# EAGLE board routev8.5 (EAGLE 8.6.0)
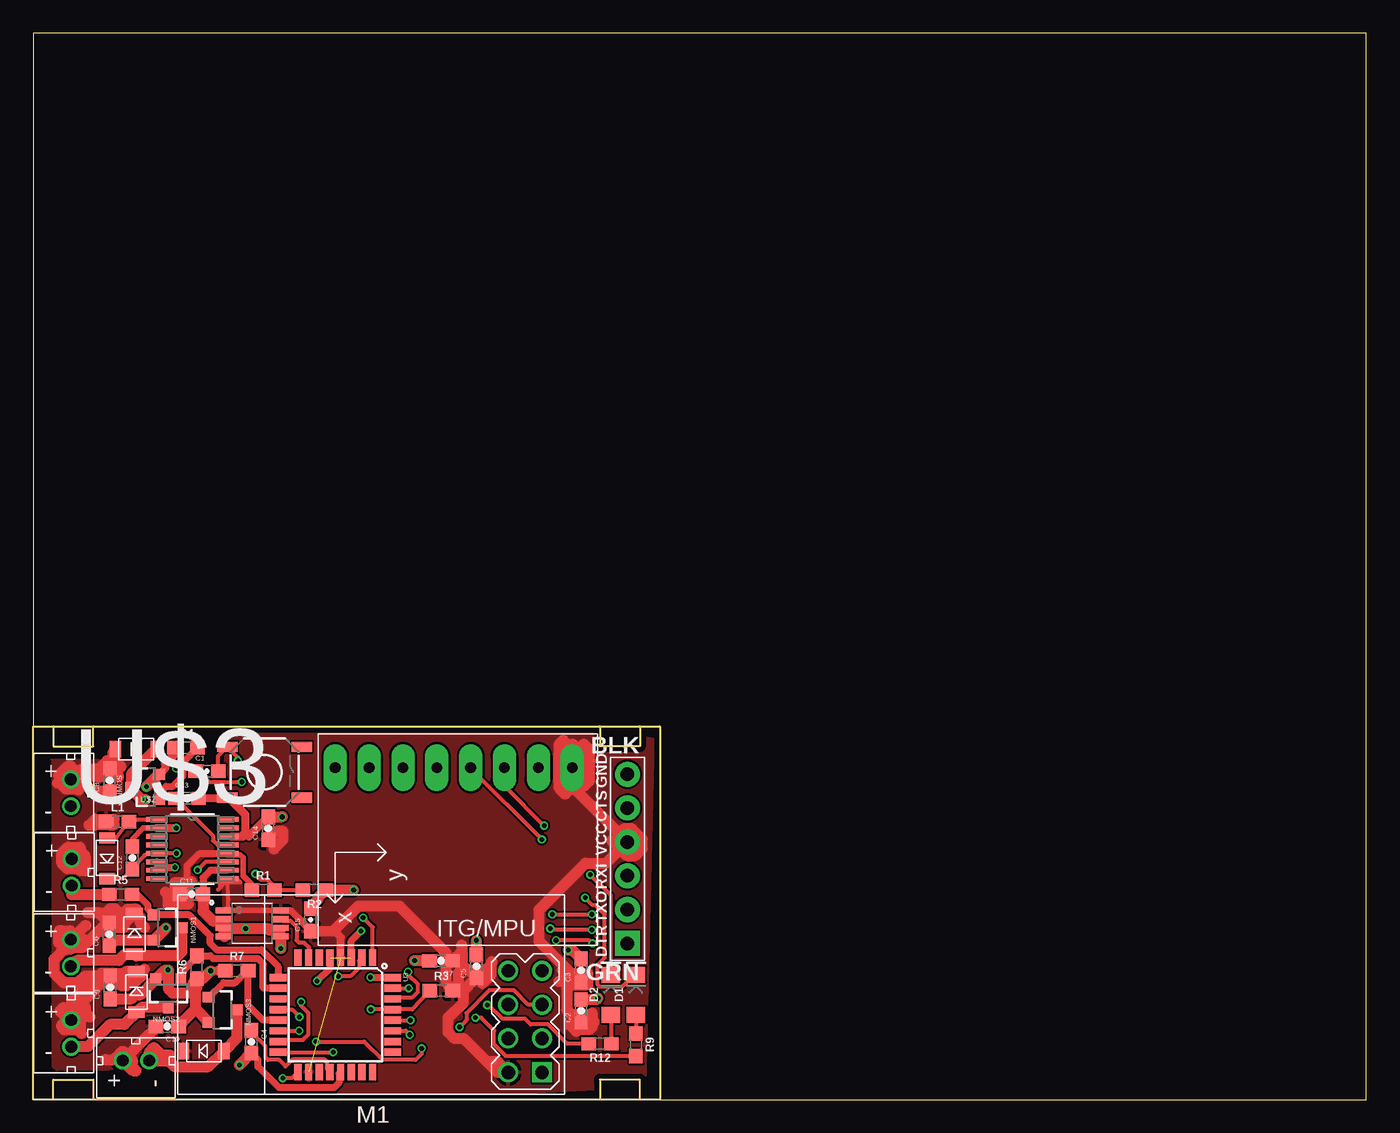
[diagram p0: board, top side]
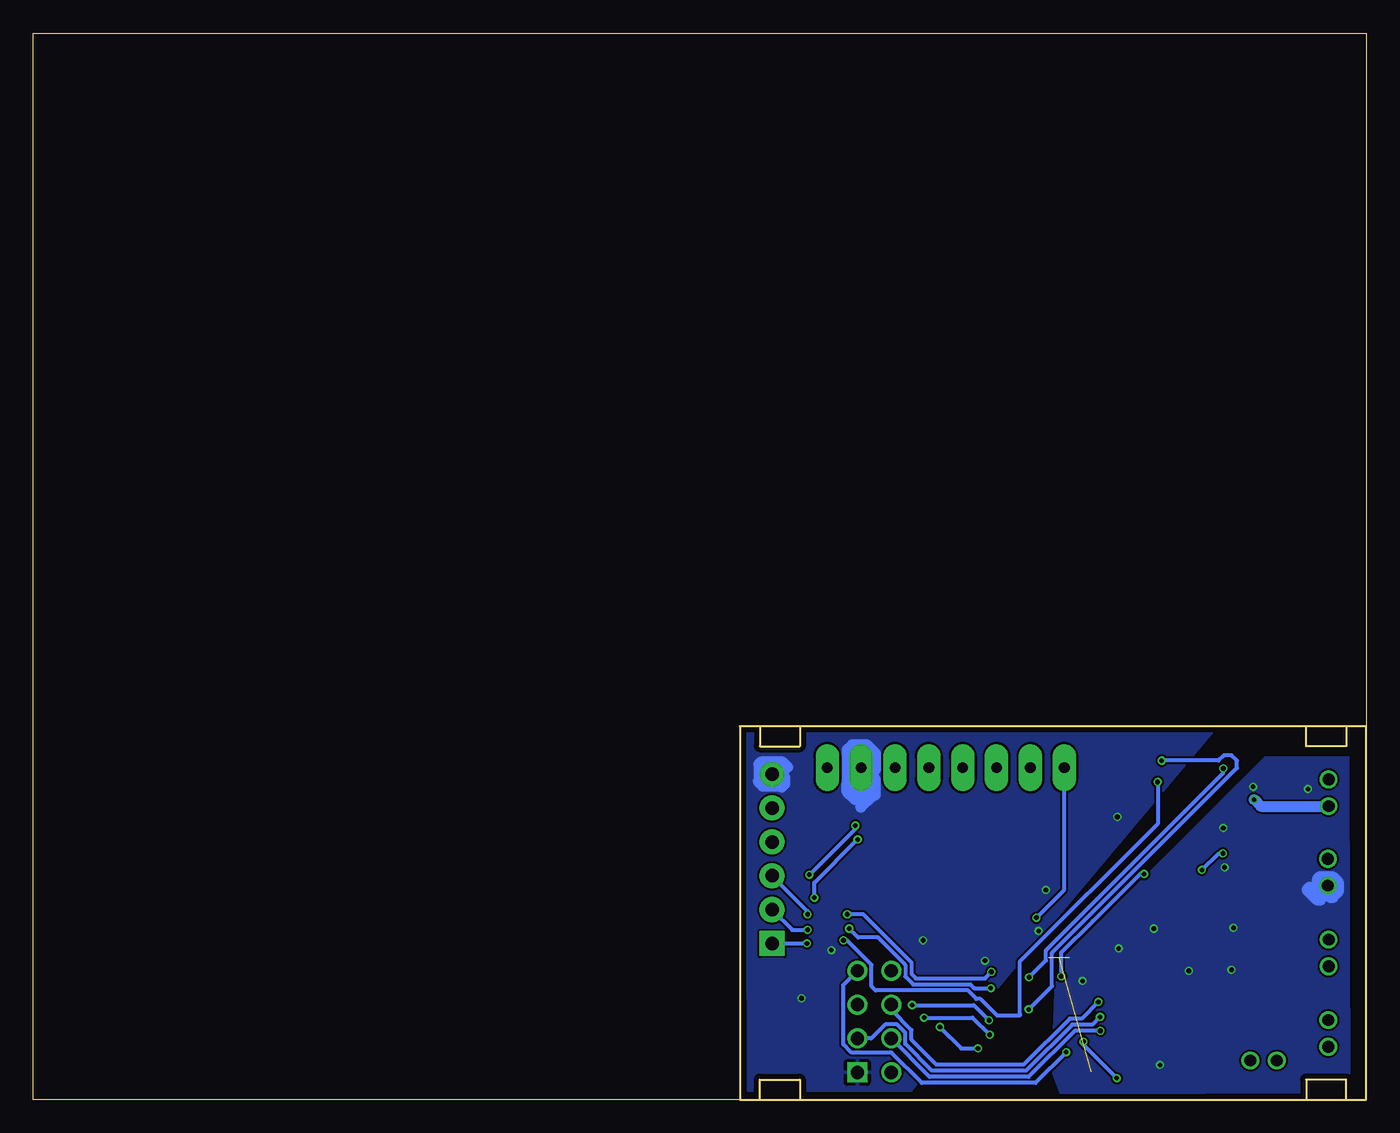
[diagram p1: board, bottom side, seen from below]

Size 100 x 80 mm. Coordinates in mm from the lower left corner, seen from the top.
Outline: 47,0 100,0 100,80 0,80 0,28
Outline: 0,28 1.5,28
Outline: 1.5,28 4.5,28
Outline: 4.5,28 42.5,28
Outline: 42.5,28 45.5,28
Outline: 45.5,28 47,28 47,0
Outline: 47,0 45.5,0
Outline: 45.5,0 42.5,0
Outline: 42.5,0 4.5,0
Outline: 4.5,0 1.5,0
Outline: 1.5,0 0,0 0,28
Outline: 42.5,28 42.5,26.5 45.5,26.5 45.5,28
Outline: 45.5,0 45.5,1.5 42.5,1.5 42.5,0
Outline: 1.5,0 1.5,1.5 4.5,1.5 4.5,0
Outline: 1.5,28 1.5,26.5 4.5,26.5 4.5,28
Copper layers (1*16): Top 0.035559375mm / dielectric 1.6mm / Bottom 0.035559375mm
Design rules "oshpark-2layer": minimum track width 6mil, minimum drill 10mil, track to track 6mil, track to pad 6mil, pad to pad 6mil, via to via 6mil, smd to smd 6mil, copper to edge 15mil, drill to drill 6mil, minimum pad ring 5mil, minimum via ring 5mil, stop-mask expansion 2.5mil, vias tented up to drill 0mil, thermal gap 10mil

## Footprints (pad centres in the part's own frame; a part is rotated, then mirrored left to right if it is on the bottom)
0603-CAP = smd 1.1 x 1: 1 -0.85,0; 2 0.85,0
LED-1206 = smd 1.2 x 1.4: A -1.5,0; C 1.5,0
MINI2-F3-B = smd 1.22 x 0.85: NEG 0,1.55; POS 0,-1.5
FTDI_DEVICE_SIDE = drill 1.016 pad 1.88 square: P$1 -6.35,0 | drill 1.016 pad 1.88: P$2 -3.81,0; P$3 -1.27,0; P$4 1.27,0; P$5 3.81,0; P$6 6.35,0
0603 = smd 1.1 x 1: 1 -0.85,0; 2 0.85,0
WIRELESS-NRF24L01 = drill 1 square: 1 -12.7,6.35 | drill 1: 2 -10.16,6.35; 3 -12.7,3.81; 4 -10.16,3.81; 5 -12.7,1.27; 6 -10.16,1.27; 7 -12.7,-1.27; 8 -10.16,-1.27
JST_CONNECTOR_FEMALE = drill 0.889: + 0,1; - 0,-1
SOT23-3 = smd 0.8 x 0.9: 1 -0.95,-1; 2 0.95,-1; 3 0,1.1
TACTILE-SWITCH-SMD = smd 1.524 x 0.762: 1 -2.794,1.905; 2 2.794,1.905; 3 -2.794,-1.905; 4 2.794,-1.905
GY-521 = drill 0.8 pad 1.778 long: ADO -8.89,-6.35; GND -8.89,6.35; INT -8.89,-8.89; SCL -8.89,3.81; SDA -8.89,1.27; VCC -8.89,8.89; XCL -8.89,-3.81; XDA -8.89,-1.27
TQFP32-08 = smd 1.27 x 0.559: 1 -4.293,2.8; 2 -4.293,2; 3 -4.293,1.2; 4 -4.293,0.4; 5 -4.293,-0.4; 6 -4.293,-1.2; 7 -4.293,-2; 8 -4.293,-2.8; 17 4.293,-2.8; 18 4.293,-2; 19 4.293,-1.2; 20 4.293,-0.4; 21 4.293,0.4; 22 4.293,1.2; 23 4.293,2; 24 4.293,2.8 | smd 0.559 x 1.27: 9 -2.8,-4.293; 10 -2,-4.293; 11 -1.2,-4.293; 12 -0.4,-4.293; 13 0.4,-4.293; 14 1.2,-4.293; 15 2,-4.293; 16 2.8,-4.293; 25 2.8,4.293; 26 2,4.293; 27 1.2,4.293; 28 0.4,4.293; 29 -0.4,4.293; 30 -1.2,4.293; 31 -2,4.293; 32 -2.8,4.293
21-0055H_16 = smd 1.6 x 0.356: 1 -2.654,2.223; 2 -2.654,1.587; 3 -2.654,0.953; 4 -2.654,0.318; 5 -2.654,-0.318; 6 -2.654,-0.953; 7 -2.654,-1.587; 8 -2.654,-2.223; 9 2.654,-2.223; 10 2.654,-1.587; 11 2.654,-0.953; 12 2.654,-0.318; 13 2.654,0.318; 14 2.654,0.953; 15 2.654,1.587; 16 2.654,2.223
SOP65P490X110-8N = smd 1.25 x 0.46: 1 -2.11,0.975; 2 -2.11,0.325; 3 -2.11,-0.325; 4 -2.11,-0.975; 5 2.11,-0.975; 6 2.11,-0.325; 7 2.11,0.325; 8 2.11,0.975

## Placement (x,y rotation side)
C1  100nF  [0603-CAP]  13.03,24.63 0 top
C2  10uF  [0603-CAP]  41.1,6.65 90 top
C3  100nF  [0603-CAP]  41.1,9.7 90 top
C4  100nF  [0603-CAP]  16.36,4.34 270 top
C5  100nF  [0603-CAP]  33.25,10.01 90 top
C6  100uF  [0603-CAP]  5.69,12.4 90 top
C7  100nF  [0603-CAP]  30.59,10.41 180 top
C8  100uF  [0603-CAP]  5.74,23.95 90 top
C9  100uF  [0603-CAP]  5.77,8.41 90 top
C10  100uF  [0603-CAP]  10.06,5.49 180 top
C11  100uF  [0603-CAP]  11.89,15.41 0 top
C12  100uF  [0603-CAP]  7.44,18.13 90 top
C13  0.1uF  [0603-CAP]  11.53,22.6 0 top
C14  4.7uF  [0603-CAP]  17.63,20.36 90 top
C15  100nF  [0603-CAP]  20.8,13.49 90 top
D1  Yellow  [LED-1206]  45.21,7.87 90 top
D2  Yellow  [LED-1206]  43.33,7.87 90 top
DIODE  DB2W40300L  [MINI2-F3-B]  7.72,26.29 90 top
DIODE1  DB2W40300L  [MINI2-F3-B]  7.59,12.42 0 top
DIODE2  DB2W40300L  [MINI2-F3-B]  7.75,8.05 0 top
DIODE3  DB2W40300L  [MINI2-F3-B]  12.8,3.63 90 top
DIODE4  DB2W40300L  [MINI2-F3-B]  5.54,18.13 180 top
J2  FTDI_DEVICE  [FTDI_DEVICE_SIDE]  44.58,18.06 90 top
L1  10uH  [0603]  6.32,20.84 0 top
M1  WIRELESS-NRF24L01  [WIRELESS-NRF24L01]  25.47,8.39 180 top
MOTOR  JST_CONNECTOR_FEMALE  [JST_CONNECTOR_FEMALE]  2.82,23.01 0 top
MOTOR1  JST_CONNECTOR_FEMALE  [JST_CONNECTOR_FEMALE]  2.82,11 0 top
MOTOR2  JST_CONNECTOR_FEMALE  [JST_CONNECTOR_FEMALE]  2.84,4.97 0 top
MOTOR3  JST_CONNECTOR_FEMALE  [JST_CONNECTOR_FEMALE]  7.7,2.92 90 top
NMOS  N-CHANNEL-MOSFET-IRLML6244TRPBF  [SOT23-3]  8.46,23.44 90 top
NMOS1  N-CHANNEL-MOSFET-IRLML6244TRPBF  [SOT23-3]  10.03,12.9 270 top
NMOS2  N-CHANNEL-MOSFET-IRLML6244TRPBF  [SOT23-3]  10.13,8 180 top
NMOS3  N-CHANNEL-MOSFET-IRLML6244TRPBF  [SOT23-3]  14.17,6.73 270 top
R1  2.2k  [0603]  17.25,15.72 0 top
R2  2.2k  [0603]  21.08,15.72 180 top
R3  10k  [0603]  30.61,8.18 0 top
R4  10k  [0603]  11.46,26.39 0 top
R5  10k  [0603]  6.55,15.39 0 top
R6  10k  [0603]  12.27,9.93 90 top
R7  10k  [0603]  15.27,9.68 0 top
R9  1k  [0603]  45.21,4.11 270 top
R12  1k  [0603]  42.52,4.19 180 top
S1  SWITCH-MOMENTARY-2SMD  [TACTILE-SWITCH-SMD]  17.35,24.56 0 top
U2  GY-521MPU6050  [GY-521]  31.54,16.01 270 top
U3  ATMEGA328P_TQFP  [TQFP32-08]  22.66,6.36 270 top
U$1  JST_CONNECTOR_FEMALE  [JST_CONNECTOR_FEMALE]  2.87,17.05 0 top
U$2  MAX1672'MAX1672'  [21-0055H_16]  11.93,18.79 0 top
U$3  LTC6930CMS8-8.19LTC6930CMS8-8.19  [SOP65P490X110-8N]  16.43,13.21 0 top

## Library data of the parts
C1 C15 = SparkFun-Capacitors; PROD_ID: CAP-00810
C2-C14 = SparkFun-Passives
D1 D2 = SparkFun-LED; PROD_ID: DIO-09909
DIODE DIODE1-DIODE4 J2 M1 MOTOR MOTOR1-MOTOR3 U2 U$1 = quad
L1 = SparkFun-Coils; PROD_ID: NDUC-07874
NMOS NMOS1-NMOS3 = quad; DATASHEET: http://www.mouser.com/ds/2/196/irlml6244pbf-936666.pdf; MOUSER: 942-IRLML6244TRPBF; URL: http://www.mouser.com/Search/ProductDetail.aspx?R=IRLML6244TRPBFvirtualkey57370000virtualkey942-IRLML6244TRPBF
R1-R7 R9 R12 = SparkFun-Resistors; PROD_ID: RES-08272
S1 = quad; PROD_ID: SWCH-08247
U3 = quad; PROD_ID: IC-09069
U$2 = voltreg
U$3 = LTC6390

## Nets
BATTERY+: C6.2 C8.2 C9.2 C10.2 C11.1 DIODE1.NEG DIODE2.NEG DIODE3.NEG DIODE.NEG L1.1 MOTOR1.+ MOTOR2.+ MOTOR3.+ MOTOR.+ R1.1 U$1.+ U$2.12
FTDI-RX: J2.P$3 U3.30
FTDI-TX: J2.P$2 U3.31
GND: C2.2 C3.2 C4.2 C5.2 C6.1 C7.2 C8.1 C9.1 C10.1 C11.2 C12.2 C13.2 C14.2 C15.2 J2.P$6 M1.1 NMOS1.2 NMOS2.2 NMOS3.2 NMOS.2 R2.1 R4.1 R5.1 R6.1 R7.1 S1.3 U2.GND U3.3 U3.5 U3.21 U$1.- U$2.2 U$2.6 U$2.7 U$2.10 U$2.14 U$3.2 U$3.3 U$3.4 U$3.5 U$3.6
IMU-INT: U2.INT U3.1
IMU-SCL: D2.C U2.SCL
IMU-SDA: D1.C U2.SDA
MEASURE_PIN: R1.2 R2.2 U3.2
MOTOR1: NMOS.1 R4.2 U3.32
MOTOR2: NMOS1.1 R5.2 U3.9
MOTOR3: NMOS2.1 R6.2 U3.10
MOTOR4: NMOS3.1 R7.2 U3.13
N$1: DIODE4.POS L1.2 U$2.1
N$2: C4.1 U3.20
N$3: D1.A R9.1
N$4: DIODE1.POS MOTOR1.- NMOS1.3
N$5: DIODE2.POS MOTOR2.- NMOS2.3
N$6: DIODE.POS MOTOR.- NMOS.3
N$7: DIODE3.POS MOTOR3.- NMOS3.3
N$8: R9.2 U3.27
N$9: D2.A R12.1
N$10: R12.2 U3.28
N$12: C1.1 J2.P$1
OSC1: U3.7 U$3.7
RESET: C1.2 R3.1 S1.1 U3.29
RF-CE: M1.3 U3.12
RF-CSN: M1.4 U3.14
RF-MISO: M1.7 U3.16
RF-MOSI: M1.6 U3.15
RF-SCK: M1.5 U3.17
VCC: C2.1 C3.1 C5.1 C7.1 C14.1 C15.1 J2.P$4 M1.2 R3.2 U2.VCC U3.4 U3.18 U$2.9 U$3.1 U$3.8
VR-PS: C12.1 DIODE4.NEG U$2.5 U$2.11
VR-REF: C13.1 U$2.13

## Tracks (layer width: path | path; a pad name or v marks a point on that pad's centre or on a via)
BATTERY+
  Top 0.406: U$2.12 14.69,18.37 15.54,18.37 15.74,18.16 15.74,16.8 16.4,16.14 R1.1
  Top 0.508: U$2.12 14.54,18.42 12.41,18.42 11.53,17.55 11.53,16.28
  Top 0.813: C6.2 6.87,13.24 DIODE1.NEG 8.02,13.54 8.02,13.51 | C6.2 5.1,12.65 4.96,12.65 4.3,12 3.83,12 | C9.2 5.98,9.47 6.82,9.47 6.95,9.6 8.14,9.6 8.23,9.68 | C9.2 4.71,9.26 2.87,7.42 2.87,6.93 2.84,6.91 MOTOR2.+ 2.67,5.97 2.01,6.63 2.26,6.88 3.25,6.88 | C8.2 3.6,24.79 MOTOR.+ 2.52,24.31 1.91,24.31 2.6,25 2.82,25 3.73,24.09 3.73,24.02 3.4,23.69 3.4,23.21 3.34,23.27 2.46,23.27 2.01,23.72 1.83,23.72 | DIODE.NEG 6,26.11 6,25.55 6.56,24.99 6.37,24.8 C8.2 | MOTOR3.+ 9.21,5.43 C10.2 | MOTOR3.+ 6.62,3 | 6.62,3 6.04,3 | 5.41,3 6.04,3 | 6.04,3 6.66,3.61 6.75,3.61 7.44,2.92 7.44,2.82 | MOTOR3.+ 7.46,2.16 7.68,2.16 | 7.68,2.16 7.7,2.14 | 7.68,2.16 6.84,3 6.62,3 | 3.25,6.88 3.91,6.88 3.91,6.55 4.27,6.2 3.5,6.2 3.5,5.08 | 3.5,5.08 3.62,4.97 | 3.5,5.08 3.37,5.22 2.35,5.22 2.13,5.44 2.13,5.64 | 2.14,12.68 1.98,12.68 | 2.14,12.68 2.74,12.68 3.42,12 3.83,12 | MOTOR1.+ 3.88,13.06 3.96,13.06 | MOTOR1.+ 2.44,11.62 2.44,11.26 1.91,11.79 1.91,12.44 2.14,12.68 | MOTOR1.+ 2.82,11.36 | 2.82,11.36 2.74,11.28 | 2.82,11.36 2.86,11.4 | 2.86,11.4 3.24,11.4 | 3.24,11.4 3.83,12 | U$1.+ 2.87,17.64 2.54,17.31 2.13,17.71 2.13,18.47 2.59,18.92 3.5,18.92 3.5,18.67 3.89,18.29 3.89,17.17 3.53,17.17 3.39,17.31 2.82,17.31 | C8.2 6.33,24.21 | 6.33,24.21 6.39,24.21 | 6.33,24.21 4.82,24.21 4.77,24.26 4.52,24.26 4.52,24.4 5.54,25.42 | 4.46,20.84 L1.1 5.71,20.61 6.07,20.61 | 4.46,20.84 4.19,20.57 4.66,20.57 4.7,20.61 5.65,20.61 6.07,21.03 4.64,21.03 4.46,20.84 | C6.2 4.91,14.02 | 4.91,14.02 4.06,14.02 | 4.91,14.02 5.49,14.02 5.79,14.33 6.12,14.33 6.66,13.79 6.07,13.79 | 5.89,14.1 5.89,13.97 6.07,13.79 | 11.53,16.28 10.64,16.28 10.64,15.81 C11.1 10.07,15.41
  Top 0.813: 10.07,15.41 9.91,15.57 | 10.07,15.41 10.08,15.39 10.08,14.68 10.1,14.67 11.64,14.67 11.63,14.68 11.63,16.14 11.85,16.36 | DIODE2.NEG 6.71,8.56 | 6.71,8.56 7.03,8.56 7.3,8.83 7.65,8.83 8.23,9.41 8.23,9.68 | 8.23,9.68 8.35,9.8 | C9.2 5.17,8.67 5.03,8.67 3.25,6.88 | C9.2 5.55,9.47 5.13,9.47 5.94,8.67 6.5,8.67 6.6,8.56 6.71,8.56 | C9.2 3.86,9.26 3.34,8.74 2.3,8.74 1.56,9.48 1.56,10.52 2.44,11.4 2.86,11.4 | 3.24,11.4 3.68,11.4 6.07,13.79 | C6.2 6.02,12.92 | 6.02,12.92 6.78,12.92 | 6.02,12.92 5.7,12.92 | 5.7,12.92 5.43,12.65 | 5.7,12.92 7.06,14.28 7.75,14.28 | 8.02,13.51 8.02,13.22 | 8.02,13.22 8.33,12.92 8.02,13.22 | 8.02,13.22 8.02,13.51 | 8.02,13.51 8.02,13.61 8.02,13.51
  pour Top: 1.32,25.55 13.54,25.4 13.54,2.31 1.75,2.18 1.47,2.46 1.47,25.4
FTDI-RX  (via drill 0.35)
  Top 0.305: v28.12,9.58 28.12,9.37 28.85,8.64 28.85,8.07 28.45,7.67 27.07,7.67 U3.30 | v38.94,13.89 v41.91,13.89
  Bottom 0.305: v28.12,9.58 28.6,9.09 33.27,9.09 33.78,9.09 34.12,9.43 34.12,9.8 34.12,10.29 37.73,13.89 v38.94,13.89 | J2.P$3 41.91,14.12 v41.91,13.89
FTDI-TX  (via drill 0.35)
  Top 0.305: U3.31 v28.17,8.36 | v41.91,12.72 38.89,12.72 v38.79,12.83
  Bottom 0.305: v28.17,8.36 29.41,8.36 29.69,8.63 33.98,8.63 34.58,9.23 34.58,10.1 36.65,12.17 38.12,12.17 38.35,12.39 v38.79,12.83 | J2.P$2 43.05,12.72 v41.91,12.72
GND  (via drill 0.35)  (1 unrouted)
  Top 0.305: U$2.14 14.87,19.74 | 15.9,20.01 16.16,19.75 16.16,19.74 | 18.54,12.71 U$3.5 U$3.6 | U$3.3 U$3.2
  Top 0.406: C12.2 7.44,19.56 8.26,20.38 U$2.2
  Top 0.508: R7.1 14.39,9.65 v13.31,9.65 | U$2.7 U$2.6 9.69,17.42 v10.62,17.42 | U3.5 22.26,9.86 v21.29,8.89 | U3.3 23.86,11.92 v24.59,12.65 | C4.2 16.87,2.98 16.87,2.45 18.43,0.89 22.57,0.89 22.94,1.26 22.94,1.95 U3.21 | U$2.10 13.3,17.2 12.74,16.64 C11.2
  Top 0.61: C13.2 14.56,22.6 S1.3 14.62,22.65 15.9,21.38 15.9,20.01 15.72,19.84 15.72,19.74 14.87,19.74 | 16.16,19.74 C14.2 | NMOS.2 9.88,24.82 9.88,25.19 10.61,25.91 R4.1 | U$2.2 v10.72,20.38 v10.72,20.37
  Top 0.813: C8.1 4.37,23.1 v4.37,23.29 | U$1.- 2.87,15.39 R5.1 | C9.1 7.39,7.56 7.7,7.87 8.05,7.87 NMOS2.2 9.91,9.73 v10.11,9.73 10.13,9.71 10.13,8.32 10.45,7.99 11.72,7.99 12.04,8.32 12.04,8.86 R6.1 | C6.1 6.1,11.95 NMOS1.2 v9.96,12.88 | 14.32,12.83 U$3.3 14.32,13.39 13.47,13.39 12.74,14.12 C11.2 | 14.32,12.83 v15.93,12.83 17.61,12.83 17.73,12.71 18.54,12.71 | U$3.4 14.32,12.83 | NMOS.2 9.41,24.39 v8.48,23.47 | R7.1 13.95,9.68 | C14.2 v18.67,21.21 | v13.31,9.65 12.74,9.08 R6.1 | R6.1 12.27,8.42 12.16,8.31 12.16,6.79 | NMOS3.2 12.16,6.79 | 12.16,6.79 10.91,5.53 C10.1 | C7.2 v28.6,10.41 | C5.2 v33.25,11.94 | C3.2 40.45,11.2 v40.13,11.2 | C2.2 42.28,7.5 v42.37,7.59 | v24.03,15.72 R2.1 21.34,15.13 21.34,14.99 20.8,14.45 C15.2 | U$3.5 18.54,11.35 v18.57,11.33 | C4.2 15.47,2.6 v15.47,2.59
  Bottom 0.813: J2.P$6 43.94,24.41 43.41,24.94 43.79,25.32 45.41,25.32 45.57,25.17 45.57,23.93 45.62,23.88 45.26,23.52 43.92,23.52 43.84,23.44 43.61,23.67 43.61,24.21 | U2.GND 37.89,21.95 | 37.89,21.95 37.92,21.92 | 37.89,21.95 37.01,22.84 36.83,22.84 36.83,24.05 37.06,24.28 37.64,23.7 | 37.64,23.7 37.64,23.01 | 37.64,23.7 37.64,23.93 36.8,24.77 36.8,25.95 37.47,26.62 38.56,26.62 38.94,26.24 38.94,23.7 38.98,23.66 38.98,23.13 38.35,22.5 38.35,23.16 38.41,23.22 | U$1.- 3.43,15.49 3.43,14.96 3.66,14.96 4.45,15.75 4.27,15.93 3.79,15.93 3.66,16.05 3.66,16.56 3.48,16.74 2.52,16.74 2.11,16.33 2.11,15.54 2.49,15.16 2.67,15.16
  pour Bottom: 1.3,25.65 7.62,25.65 23.27,10.01 23.57,2.16 22.94,0.48 1.24,0.53
  pour Bottom: 11.05,28.12 46.51,28.17 46.41,0.66 34.14,0.61
IMU-INT  (via drill 0.35)
  Top 0.305: U3.1 25.46,12.92 v24.74,13.64
  Bottom 0.305: v24.74,13.64 22.65,15.73 U2.INT
IMU-SCL  (via drill 0.35)
  Top 0.305: D2.C 43.33,15.32 v41.78,16.87 | U2.SCL 35.35,23.53 v38.33,20.55
  Bottom 0.305: v41.78,16.87 38.33,20.32 v38.33,20.55
IMU-SDA  (via drill 0.35)
  Top 0.305: D1.C 45.06,9.37 44.16,8.46 42.5,8.46 42.32,8.64 42.32,10.1 42.87,10.64 42.87,13.9 42.19,14.58 41.96,14.58 v41.4,15.14 | v38.15,19.51 32.81,24.85 U2.SDA
  Bottom 0.305: v38.15,19.51 38.17,19.51 41.4,16.27 v41.4,15.14
MEASURE_PIN  (via drill 0.35)
  Top 0.305: R2.2 R1.2 18.1,15.99 17.55,16.54 17.02,16.54 v16.66,16.92 | U3.2 24.44,10.43 24.44,9.89 23.8,9.25 v22.89,9.25
  Bottom 0.305: v22.89,9.25 22.89,11.04 20.51,13.38 16.85,16.99 v16.66,16.92
MOTOR1  (via drill 0.35)
  Top 0.508: NMOS.1 9.72,22.76 9.72,23.27 9.96,23.5 10.47,23.5 11.23,24.26 11.23,24.84 | R4.2 11.23,25.3 11.23,24.84 | v25.3,9.17 26.94,9.17 U3.32 | 11.23,24.84 v10.72,24.84
  Bottom 0.305: v25.3,9.17 24.03,10.44 24.03,11.19 10.72,24.5 v10.72,24.84
MOTOR2
  Top 0.508: R5.2 7.78,15.39 8.61,14.56 8.61,14.28 NMOS1.1 11.71,13.85 13.28,12.29 13.28,11.72 13.75,11.24 17.11,11.24 18.36,9.99 U3.9
MOTOR3
  Top 0.508: U3.10 17.25,8.36 17.25,10.17 16.83,10.58 13.48,10.58 13.28,10.78 R6.2 12.27,10.71 11.23,9.67 11.23,9.15 NMOS2.1 11.2,9
MOTOR4
  Top 0.508: U3.13 17.23,5.96 16.13,7.06 16.13,9.66 | 16.13,9.66 R7.2 | NMOS3.1 14.26,8.77 15.13,8.77 16.03,9.66 16.13,9.66
N$1
  Top 0.305: DIODE4.POS 6.24,19.63 L1.2 7.62,21.01 U$2.1
N$2
  Top 0.305: U3.20 22.04,2.28 22.04,2.83 21.86,3 19.45,3 18.93,2.48 18.44,2.97 17.6,2.97 17.43,3.15 17.43,3.98 16.36,5.05 C4.1
N$3
  Top 0.305: D1.A R9.1
N$4
  Top 0.813: NMOS1.3 11.13,11.08 10.82,10.77 7.75,10.77 DIODE1.POS 6.91,10.92 6.42,10.44 3.26,10.44 MOTOR1.-
N$5
  Top 0.813: NMOS2.3 8.1,6.9 DIODE2.POS 6.83,5.63 5.75,5.63 4.08,3.97 MOTOR2.-
N$6  (via drill 0.35)
  Top 0.813: DIODE.POS 7.36,24.43 NMOS.3 7.52,23.28 7.52,23.07 8.08,22.5 v8.41,22.5
  Bottom 0.813: v8.41,22.5 7.92,22.01 MOTOR.-
N$7
  Top 0.813: NMOS3.3 15.27,4.6 DIODE3.POS 13.13,2.46 10.6,2.46 10.14,2.92 MOTOR3.- 8.7,3.56 9.05,3.91 9.6,3.35 10.27,3.35
N$8  (via drill 0.35)
  Top 0.305: U3.27 27.94,5.16 v28.25,4.85 | R9.2 35.45,3.26 34.58,4.14 34.58,5.17 33.6,6.15 v33.17,6.15
  Bottom 0.305: v33.17,6.15 29.54,6.15 v28.25,4.85
N$9
  Top 0.305: D2.A 43.33,4.22 R12.1
N$10  (via drill 0.35)
  Top 0.305: R12.2 40.06,4.19 38.61,5.64 37.32,5.64 36.89,6.06 35.2,6.06 34.17,7.09 v34.06,7.09 | U3.28 26.96,5.94 v28.3,5.94
  Bottom 0.305: v34.06,7.09 29.44,7.09 v28.3,5.94
N$12  (via drill 0.35)
  Top 0.305: C1.1 12.4,24.64 13.21,23.83 v15.64,23.83 v15.65,23.82 | v41.96,11.71 41.73,11.94 v39.22,11.94
  Bottom 0.305: v15.65,23.82 15.65,20.68 26.01,10.32 26.01,6.47 25.98,6.45 25.98,6.3 27.68,6.3 28.93,7.54 29.25,7.54 29.88,8.18 36.8,8.18 37.12,8.49 37.12,10.1 38.96,11.94 v39.22,11.94 | J2.P$1 v41.96,11.71 | v41.96,11.71
OSC1
  Top 0.305: U$3.7 18.66,13.42 19.3,13.42 19.74,12.97 19.74,11.96 19.92,11.78 20.29,11.78 20.66,11.42 U3.7
RESET  (via drill 0.35)
  Top 0.305: C1.2 13.86,25.76 S1.1 15.34,25.68 v15.34,25.43 | R3.1 28.44,6.76 U3.29 v25.32,6.76
  Bottom 0.305: v25.32,6.76 23.57,8.51 23.57,11 9.71,24.86 9.71,25.43 10.11,25.83 10.67,25.83 11.07,25.43 v15.34,25.43
RF-CE  (via drill 0.35)
  Top 0.305: U3.12 19.41,6.76 v19.96,6.2
  Bottom 0.305: v19.96,6.2 20.55,5.61 22.06,5.61 25.52,2.16 32.57,2.16 34.58,4.17 34.58,5.02 35.2,5.64 36.07,5.64 37.13,4.58 M1.3
RF-CSN  (via drill 0.35)
  Top 0.305: U3.14 v19.94,5.16
  Bottom 0.305: v19.94,5.16 21.87,5.16 25.33,1.7 32.76,1.7 M1.4
RF-MISO  (via drill 0.35)
  Top 0.305: U3.16 v22.5,3.56
  Bottom 0.305: v22.5,3.56 24.82,1.24 33.34,1.24 35.62,3.52 38.61,3.52 39.23,4.14 39.23,8.6 M1.7
RF-MOSI  (via drill 0.35)
  Top 0.305: v20.09,7.32 20.09,7.04 20.65,6.48 20.65,4.9 20.22,4.47 18.48,4.47 U3.15
  Bottom 0.305: v20.09,7.32 21.34,6.07 22.25,6.07 25.7,2.62 32.26,2.62 34.12,4.47 34.12,5.21 35.63,6.72 M1.6
RF-SCK  (via drill 0.35)
  Top 0.305: U3.17 19.39,1.6 v18.72,1.6 | v21.21,4.34 24.82,4.34 26.19,2.97 28.67,2.97 29.13,3.44 v29.13,3.83 | M1.5 37.13,7.12 36.07,8.18 34.19,8.18 32.49,6.48 32.49,5.95 v31.98,5.44
  Bottom 0.305: v18.72,1.6 21.21,4.09 v21.21,4.34 | v31.98,5.44 30.38,3.83 v29.13,3.83
VCC  (1 unrouted)
  Top 0.305: U$3.1 14.62,14.48 14.62,15 U$2.9 14.25,16.23 13.99,16.23 13.99,15.87 13.87,15.75 14.4,16.28 15.54,16.28 15.24,16.59 15.24,16.66
  Top 0.406: U$3.1 U$3.8
  Top 0.508: C15.1 20.3,13.16 20.3,13.2 19.32,14.18 U$3.8
  Top 0.61: U3.4 23.06,12.15 22.55,12.66
  Top 0.813: 42.07,5.82 42.06,5.8 C2.1 40.96,5.8 40.62,6.15 | 40.37,6.4 41.07,6.4 | 41.07,6.4 41.83,6.4 41.92,6.49 41.92,5.44 41.73,5.25 40.88,5.25 40.74,5.1 40.26,5.59 40.62,5.94 | 40.62,5.94 41.07,6.4 | C3.1 41.08,8.84 | 41.08,8.84 39.42,8.84 | 41.08,8.84 41.48,8.84 41.61,8.7 40.46,8.7 40.37,8.61 | 40.37,8.61 40.79,8.61 | 40.86,8.61 41.55,8.61 | 41.55,8.61 41.61,8.67 41.61,9.44 40.51,9.44 | 40.11,9.7 40.37,9.44 40.51,9.44 | 40.11,9.7 39.7,9.7 40.79,8.61 | 41.61,8.61 41.55,8.61 | 34.04,2.85 34.83,2.85 M1.2 34.84,2.04 34.04,2.85 | C5.1 32.66,9.75 32.52,9.75 31.86,10.41 C7.1 32.16,11.13 | J2.P$4 40.43,23.48 U2.VCC 40.43,23.43 39.9,22.91 39.45,23.37 39.45,26.64 39.75,26.95 40.06,26.64 40.49,26.64 41.2,25.93 | C5.1 32.27,8.18 | 32.27,8.18 R3.2 30.97,8.77 30.97,11.02 27.49,14.5 24.38,14.5 22.55,12.66 C15.1 | 34.04,2.85 32.31,4.58 31.62,4.58 31.12,5.08 31.12,6.12 32.27,7.27 32.27,8.18 | C3.1 40.86,8.61 | 40.86,8.61 40.79,8.61 | 40.37,8.61 40.04,8.29 40.04,6.72 40.37,6.4 | 40.37,6.4 40.62,6.15 | 40.62,6.15 40.62,5.94 | C3.1 40.51,9.44 | J2.P$4 42.98,17.73 41.43,17.73 37.92,14.22 37.92,11.88 40.11,9.7 | C14.1 17.91,19.79 17.91,20.1 18.36,20.1 18.4,20.14 18.72,20.14 18.72,19.48 18.03,18.8 | 32.16,11.13 32.16,11.58 | 32.16,11.13 32.16,9.78 31.88,9.5 31.88,8.57 32.27,8.18 | C5.1 33.84,9.75 33.98,9.75 34.31,10.08 34.31,10.22 34.39,10.3 | 34.39,10.3 34.39,10.34 | 34.39,10.3 34.39,10.27 34.33,10.2 34.33,9.32 33.69,8.68 | J2.P$4 43.48,19.33 | 43.48,19.33 43.38,19.43 | 43.48,19.33 44.53,18.29 45.14,18.29 45.67,18.82 45.67,19.53 44.88,20.32 44.35,20.32 | 41.2,25.93 41.2,25.43 | 41.2,25.93 41.2,26.54 41.3,26.64 41.64,26.31 41.64,26.14 41.71,26.07 41.71,23.9 41.27,23.47 41.2,23.47
  pour Top: 14.38,27.76 13.97,1.19 19.1,-0.41 45.92,0.94 46.56,27.05 41.05,27.94
VR-PS  (via drill 0.35)
  Top 0.305: DIODE4.NEG 6.74,16.58 7.42,17.25 | 7.42,17.25 C12.1 | v10.74,18.47 9.34,18.47 U$2.5 8.56,18.47 8.4,18.32 8.35,18.32 7.42,17.38 7.42,17.25 | U$2.11 12.94,17.84 v12.32,17.22
  Bottom 0.305: v12.32,17.22 11.07,18.47 v10.74,18.47
VR-REF
  Top 0.305: C13.1 13.48,19.8 13.48,19.44 13.81,19.11 U$2.13